# Altium PCB CPU-board-multi-ver3.PcbDoc (part 2 of 3)
Units mil, origin at the board's own origin, x right, y up, seen from the top; angles counter-clockwise.
Board outline 3937 x 2607 mil, 6 copper layers (L1, Power, L2, L3, CommonGND, L4), stack 84 mil thick; 298 components, 216 nets, 1009 pads, 421 vias.
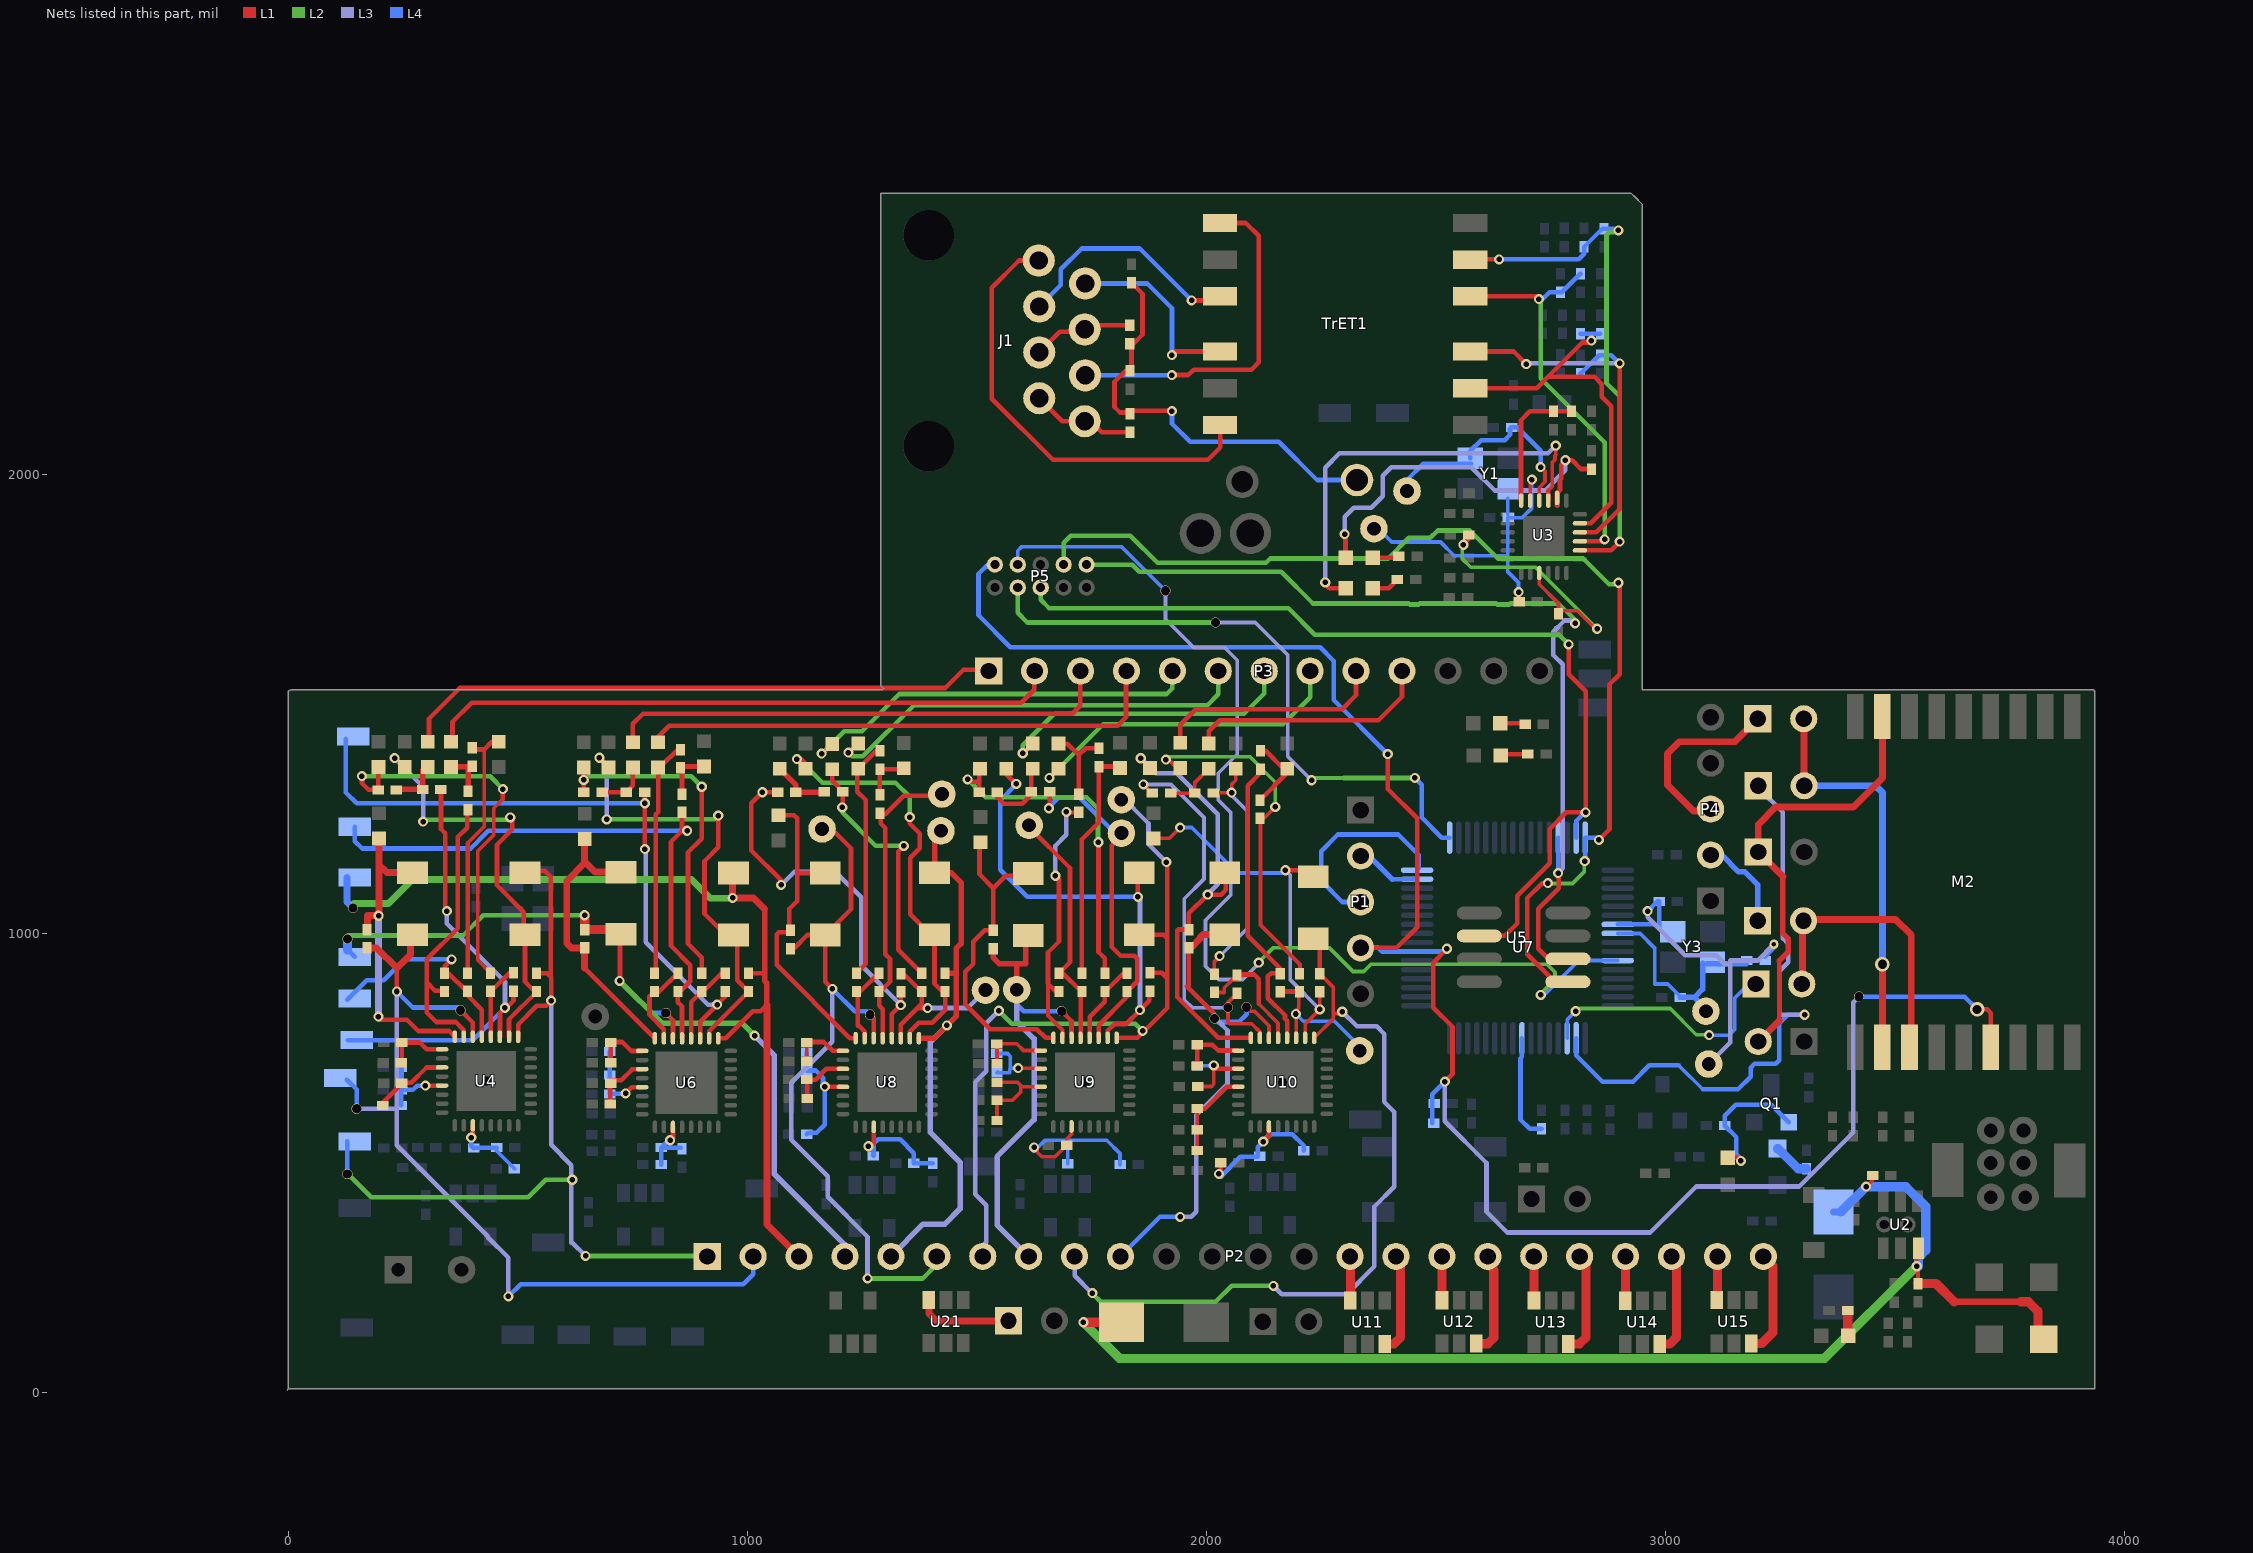
[diagram p6: the nets of this part, all layers, seen from the top]

## Via types
v1: diameter 22, hole 12, L1 to L4, 370 vias
v2: diameter 22, hole 20, L1 to L4, 19 vias
v3: diameter 32, hole 20, L1 to L4, tented top, 19 vias
v4: diameter 20, hole 10, L1 to L4, 4 vias
v5: diameter 22, hole 12, L1 to L4, tented top, 4 vias
v6: diameter 32, hole 20, L1 to L4, 4 vias
v7: diameter 32, hole 18, L1 to L4, tented top, 1 vias

## Nets (pads, with @x,y where several pads share a name; then routed paths per layer and width w, separated by ;. In a path a pad name is that pad's centre, name@x,y a point inside that pad or via, vN(x,y) a via of type N, cw(c..) or ccw(c..) an arc to the next point about the centre after c; other vN are vias at no path point) (continued)
NetC16_2: C16.2 C17.1 U3.6 | length 293.7
  L1 w10: U3.6@2685.76,1942.53 2685.33,1942.96 2685.33,2117.99 2704.79,2137.45 C16.2@2755.97,2137.45 C17.1@2795.34,2137.45
NetC18_1: C18.1 R23.1 TrET1.4 U3.21 | length 899.3
  L1 w10: TrET1.4@2574.87,2387.37 2718.36,2387.37 2724.47,2381.27 v1(2724.47,2381.54) ; U3.21@2813.71,1853.95 2863.54,1853.95 2863.54,1854.11 v1(2867.49,1858.06)
  L2 w10: v1(2724.47,2381.54) 2728.13,2377.88 2728.13,2208.6 2867.49,2069.24 v1(2867.49,1858.06)
  L4 w10: v1@2728.26,2377.74 v1@2728.4,2377.61 ; v1@2728.41,2377.61 2747.46,2396.66 C18.1@2771.72,2396.66 ; C18.1@2774.42,2396.66 2814.42,2436.66 R23.1@2815.02,2436.66
NetC19_1: C19.1 R24.1 TrET1.5 U3.20 | length 1170.1
  L1 w10: TrET1.5@2574.87,2467.37 2575.65,2468.16 v1(2637.86,2468.16) ; U3.20@2813.71,1834.26 2881.86,1834.26 2900.13,1852.53 v1(2900.13,1853.53)
  L2 w10: v1@2897.69,2527.21 2878.02,2527.21 2871.65,2520.84 2871.65,2198.01 2900.13,2169.53 v1(2900.13,1853.53)
  L4 w9: C19.1@2823.5,2495.72 R24.1@2862.87,2535.09
  L4 w10: v1(2637.86,2468.16) 2811.09,2468.16 2822.9,2479.97 C19.1@2822.9,2495.72 C19.1@2823.5,2495.72 ; R24.1@2862.87,2535.09 R24.1@2866.2,2535.09 2889.83,2535.09 2897.7,2527.21 v1(2897.69,2531.14)
NetC20_1: C20.1 R25.1 TrET1.2 U3.23 | length 846.5
  L1 w10: TrET1.2@2574.87,2187.37 2719.28,2187.37 2744.16,2212.25 ; U3.23@2813.71,1893.32 2836.91,1893.32 2881.95,1938.35 2881.95,2148.12 2861.13,2168.94 2861.13,2196.5 2845.38,2212.25 2744.16,2212.25 ; v1@2838.65,2287.06 2818.96,2287.06 2744.16,2212.25
  L4 w10: R25.1@2815.02,2306.11 C20.1@2858.33,2306.11 ; 2837.31,2306.11 2838.65,2304.77 ; v1@2838.65,2287.06 2838.65,2306.11
  other v1: 2838.58,2291.34
NetC21_1: C21.1 R26.1 TrET1.3 U3.22 | length 869.2
  L1 w10: TrET1.3@2574.87,2267.37 2669.35,2267.37 v1(2696.91,2239.81) ; U3.22@2813.71,1873.63 2849.4,1873.63 2900.13,1924.35 v1(2900.13,2241.53)
  L3 w10: v1@2698.13,2241.53 v1(2900.13,2241.53)
  L4 w10: C21.1@2815.02,2219.5 2815.63,2219.5 2855.63,2259.5 R26.1@2858.33,2259.5 2882.16,2259.5 v1(2900.13,2241.53)
NetC22_1: C22.1 R27.2 R28.1 R33.1 R34.2 | length 937.1
  L1 w10: R33.1@1837.13,2417.53 1861.13,2393.53 1861.13,2304.53 1841.13,2284.53 R27.2@1833.13,2284.53 1837.13,2280.53 1837.13,2225.53 1824.36,2225.53 1800.13,2201.29 1800.13,2146.53 1812.13,2134.53 1831.13,2134.53 R34.2@1834.13,2131.53 1841.13,2138.53 v1@1925.26,2138.53
  L4 w10: v1(1925.26,2137.45) 1925.26,2109.89 1964.63,2070.52 2158.13,2070.52 2241.19,1987.46 C22.1@2328.13,1987.46
NetC24_1: C24.1 R36.1 U3.15 | length 624.7
  L1 w8: v1(2560.13,1846.53) 2571.13,1857.53 R36.1@2571.13,1867.53 ; U3.15@2725.13,1785.05 2725.13,1760.53 2767.13,1718.53 C24.1@2767.13,1696.53 C24.1@2771.13,1692.53 ; C24.1@2775.93,1702.73 2808.17,1702.73 2847.13,1663.77 2847.13,1659.53 v1(2851.13,1663.53)
  L2 w8: v1(2560.13,1846.53) 2557.13,1846.53 2557.13,1816.61 2576.2,1797.53 2716.88,1797.53 2850.88,1663.53 v1(2851.13,1663.53)
NetC25_1: C25.1 TP3.1 U3.4 Y1.1 | length 516.6
  L1 w8: U3.4@2725.13,1942.53 2725.13,1970.87 2737.73,1983.47 2737.73,2005.93 v1(2728.13,2015.53) ; v1@2728.41,2017.69 v1@2729.35,2016.75
  L4 w10: TP3.1@2437.13,1963.53 2437.13,1987.53 2472.13,2022.53 Y1.1@2577.13,2022.53 ; Y1.1@2574.87,2035.09 2574.87,2050.83 2598.49,2074.46 2649.67,2074.46 2661.48,2086.27 2661.48,2099.37 2664.13,2102.02 C25.1@2665.42,2102.02 2677.23,2102.02 2728.13,2051.12 v1(2728.13,2015.53)
NetC26_1: C26.1 R35.2 TP2.1 U3.5 Y1.3 | length 710.2
  L1 w8: v1(2680.13,1743.53) 2681.13,1742.53 R35.2@2681.13,1722.53 ; U3.5@2705.44,1942.53 v1@2705.44,1984.84
  L4 w8: TP2.1@2365.13,1881.53 2375.13,1881.53 2404.13,1852.53 2510.13,1852.53 2540.13,1822.53 2656.23,1822.53 ; C26.1@2656.23,1912.43 Y1.3@2656.23,1948.09 ; v1(2680.13,1743.53) 2680.13,1764.53 2656.23,1788.43 2656.23,1822.53 ; v1(2709.13,1988.53) 2709.13,1926.53 2687.76,1905.17 2656.23,1905.17 2656.23,1822.53
NetC27_1: C27.1 C33.1 C39.1 U4.27 | length 167.4
  L1 w10: v1(399.13,555.53) 397.21,557.45 397.04,557.45 402.6,563 U4.27@402.6,582.07
  L4 w8: C33.1@454.13,533.53 454.13,526.53 C27.1@493.13,487.53
  L4 w10: v1(399.13,555.53) 399.13,537.53 C39.1@404.13,532.53 405.13,533.53 C33.1@454.13,533.53
NetC28_1: C28.1 C32.1 C36.1 U4.21 | length 177
  L1 w10: v1(299.13,668.53) 299.13,669.53 299.97,668.69 U4.21@335.67,668.69
  L4 w10: C28.1@246.13,625.53 246.13,658.53 C36.1@247.13,659.53 ; C32.1@247.13,708.53 C36.1@247.13,659.53 ; v1(299.13,668.53) 281.13,668.53 272.13,659.53 C36.1@247.13,659.53
NetC35_1: C35.1 R42.1 U4.12 | length 166
  L1 w10: U4.12@441.97,774.98 441.97,872.83 R42.1@441.13,873.67 442.17,873.67 483.03,914.53 C35.1@491.13,914.53
NetC35_2: C35.2 pad.1@149.61,767.72 R40.1 U4.11 | length 1020.4
  L1 w10: R40.1@333.13,1313.53 333.13,1227.53 342.13,1218.53 342.13,1048.53 v1(346.13,1048.53) ; U4.11@461.65,774.98 461.65,827.39 v1(472.5,838.24) ; v1@474.17,836.57 491.13,853.53 C35.2@491.13,874.53
  L2 w10: v1@472.5,837.56 v1(472.5,838.24)
  L3 w10: v1(346.13,1048.53) 346.13,1021.53 472.5,895.15 v1(472.5,838.24)
  L4 w10: pad.1@130.13,767.53 130.31,767.72 401.98,767.72 v1(472.5,838.24)
NetC42_1: C42.1 R46.2 TP11.1 U5.40 Y3.1 | length 479.8
  L4 w8: U5.40@2896.13,1000.01 2944.88,1000 2976.39,968.49 2976.39,889.76 3004.91,889.76 C42.1@3032.13,862.54
  L4 w10: 3157.58,933.07 R46.2@3176.54,933.07
  L4 w12: C42.1@3032.13,862.54 C42.1@3032.13,860.53 3063.13,860.53 ; Y3.1@3081.13,934.6 3081.13,878.53 3063.13,860.53 ; TP11.1@3088.13,830.53 3088.13,835.53 3063.13,860.53 ; Y3.1@3091.13,933.53 3158.04,933.53
NetC43_1: C43.1 L6.2 R45.2 U4.10 | length 959
  L1 w10: v1(232.28,1381.89) L6.2@254.13,1362.53 ; U4.10@481.34,774.98 481.34,812.74 541.13,872.53 C43.1@541.13,873.53 537.13,873.53 516.13,894.53 R45.2@516.13,997.53 R45.2@513.13,1000.53 ; v1(484.13,1252.53) 488.13,1248.53 488.13,1226.53 455.13,1193.53 455.13,1104.53 513.13,1046.53 R45.2@513.13,985.53
  L2 w10: v1@294.13,1247.53 479.13,1247.53 v1(484.13,1252.53)
  L3 w10: v1@230.93,1384.14 230.87,1384.14 230.54,1383.81 230.54,1383.11 294.13,1319.53 v1(294.13,1243.53)
NetC43_2: C43.2 P2.1 pad.1@145.67,547.24 R45.1 U4.9 | length 1947.1
  L1 w10: U4.9@501.02,774.98 501.02,801.43 542.13,842.53 562.13,842.53 v1(573.13,853.53) 573.13,904.53 ; R45.1@516.13,1132.53 520.13,1136.53 559.13,1136.53 572.13,1123.53 572.13,905.53 564.13,913.53 C43.2@541.13,913.53
  L2 w10: v2(129.13,476.38) v2@129.13,477.53 ; v2@129.7,476.95 181.13,425.53 523.13,425.53 561.13,463.53 v1(619.13,463.53) ; v1(648.13,297.53) 912.13,297.53 P2.1@913.13,296.53
  L3 w10: v2(129.13,476.38) v2@129.13,483.46 ; v1(573.13,853.53) 573.13,539.53 617.13,495.53 617.13,326.53 619.13,326.53 v1(648.13,297.53)
  L4 w10: v2(129.13,476.38) pad.1@129.13,547.24 ; P2.1@912.13,297.53 P2.1@913.13,296.53
NetC46_1: C46.1 U5.56 | length 232.6
  L4 w10: U5.56@2687.46,771.66 2687.46,731.52 2684.33,728.39 2684.33,594.33 2704.13,574.53 C46.1@2730.13,574.53
NetC47_1: C47.1 R46.1 TP12.1 U5.39 Y3.3 | length 813.4
  L3 w10: v1(2961.13,1048.53) 2961.13,1035.07 3043.44,952.76 3110.24,952.76 3129.92,933.07 3141.13,933.07 ; TP12.1@3094.13,715.53 3141.13,762.53 3141.13,940.94 3200.79,940.94 v4(3236.22,976.38)
  L4 w10: U5.39@2896.13,1019.69 2976.35,1019.69 2986.13,1009.91 C47.1@2986.13,1069.53 2982.13,1069.53 v1(2961.13,1048.53) ; R46.1@3216.54,948.82 3236.22,968.5 v4(3236.22,976.38)
NetC48_1: C48.1 pad.1@145.67,858.27 R50.1 U4.13 | length 477.8
  L1 w10: v1(356.13,943.53) 341.13,928.53 C48.1@341.13,913.53 349.23,913.53 389.08,873.67 R50.1@391.13,873.67 391.13,864.78 422.28,833.62 U4.13@422.28,774.98
  L4 w10: pad.1@129.13,855.53 171.24,897.64 208.66,897.64 254.55,943.53 v1(356.13,943.53)
NetC48_2: C48.2 R47.1 U4.15 | length 637.3
  L1 w10: C48.2@341.13,873.53 339.13,875.53 320.13,875.53 302.13,893.53 ; U4.15@382.91,774.98 382.91,789.22 365.04,807.09 322.83,807.09 302.13,827.8 302.13,893.53 ; R47.1@392.13,1269.53 390.13,1267.53 390.13,1230.53 370.13,1210.53 370.13,1011.53 302.13,943.53 302.13,893.53
NetC50_1: C50.1 C52.2 U4.19 | length 165.8
  L1 w10: C52.2@206.13,628.53 206.13,630.93 248.13,672.93 C50.1@248.13,673.53 ; C50.1@246.13,674.53 268.13,674.53 301.65,708.06 U4.19@335.67,708.06
NetC51_1: C51.1 C53.1 U4.17 | length 136.8
  L1 w10: C51.1@248.13,718.53 248.13,746.53 ; 248.13,747.53 C53.1@248.13,762.53 287.13,762.53 302.23,747.43 U4.17@335.67,747.43
NetC54_1: C54.1 L9.2 R53.2 U4.16 | length 705.4
  L1 w10: v1@196.13,811.75 259.12,811.75 283.34,787.53 350.68,787.53 U4.16@363.23,774.98
  L1 w15: C54.1@172.13,1008.53 173.13,1009.53 173.13,1039.02 198.13,1039.02 198.13,1149.53 ; L9.2@198.13,1206.53 198.13,1149.53 ; R53.2@271.13,1132.53 215.13,1132.53 198.13,1149.53
  L3 w15: v1@197.13,818.9 v1(197.13,1038.53)
  other v1: 196.85,818.9
NetC54_2: C54.2 P2.2 pad.1@114.17,685.04 R53.1 U4.14 | length 1962
  L1 w10: v1(237.13,873.53) 237.13,924.53 ; v2(375.98,832.68) 402.6,806.06 U4.14@402.6,774.98
  L1 w15: C54.2@172.13,968.53 193.13,968.53 237.13,924.53 267.13,954.53 267.13,993.53 R53.1@271.13,997.53
  L3 w10: v2(149.61,618.11) 237.13,618.11 ; v1(237.13,873.53) 237.13,618.11 ; v1(480.13,209.53) 480.13,293.53 435.07,338.58 435.07,340.52 237.13,538.46 237.13,618.11
  L4 w10: pad.1@128.13,681.53 149.61,660.05 v2(149.61,618.11) ; v1(237.13,873.53) 271.86,838.79 ; 271.93,838.58 370.08,838.58 v2(375.98,832.68) ; v1(480.13,209.53) 506.82,236.22 991.82,236.22 1013.13,257.53 P2.2@1013.13,296.53
NetC59_1: C59.1 C62.1 C63.1 U6.21 | length 169.1
  L1 w10: v1(735.13,651.53) 748.83,665.23 U6.21@771.51,665.23
  L2 w10: v1@735.13,650.53 v1(735.13,651.53)
  L4 w10: C62.1@701.13,742.53 C59.1@701.13,691.53 C63.1@701.13,650.53 v1@735.13,650.53
NetC60_1: C60.1 C61.1 C64.1 U6.27 | length 150
  L1 w10: v1(832.13,549.53) 834.13,549.53 838.44,553.84 U6.27@838.44,578.61
  L4 w10: C60.1@813.13,496.53 C64.1@813.13,533.53 ; v1(832.13,549.53) 834.13,549.53 837.13,552.53 832.13,552.53 C64.1@813.13,533.53 ; C61.1@855.13,533.53 C64.1@813.13,533.53
NetC65_1: C65.1 R58.1 U6.12 | length 179.2
  L1 w10: U6.12@877.81,771.53 877.81,850.21 R58.1@901.13,873.53 904.03,873.53 944.03,913.53 C65.1@952.13,913.53
NetC65_2: C65.2 pad.T14 R55.1 U6.11 | length 1439.2
  L1 w10: v1(777.13,1183.53) v1(777.13,1283.53) R55.1@777.13,1307.53 ; U6.11@897.5,771.53 897.5,807.9 v1(934.49,844.89) ; v1@938.57,848.97 952.13,862.53 C65.2@952.13,873.53
  L2 w10: v1@775.33,1285.33 v1(777.13,1283.53)
  L3 w10: v1(777.13,1183.53) 779.13,1183.53 779.13,980.53 914.76,844.89 v1(934.49,844.89)
  L4 w10: pad.T14@126.13,1423.53 126.13,1306.94 149.54,1283.53 v1(777.13,1283.53)
NetC66_1: C66.1 L12.2 R61.2 U6.10 | length 1003.6
  L1 w10: v1(678.13,1382.53) 677.13,1383.53 676.13,1383.53 L12.2@698.13,1361.53 ; U6.10@917.18,771.53 917.18,787.58 C66.1@1003.13,873.53 1002.52,873.53 978.13,897.93 978.13,988.53 R61.2@970.13,996.53 953.13,996.53 907.13,1042.53 907.13,1157.53 937.13,1187.53 v1(937.13,1256.53)
  L2 w10: v1(694.13,1248.53) 929.13,1248.53 v1(937.13,1256.53)
  L3 w10: v1(678.13,1382.53) 694.13,1366.53 v1(694.13,1248.53)
NetC66_2: C66.2 P2.3 pad.1@145.67,1122.05 R61.1 U6.9 | length 2022.7
  L1 w10: U6.9@936.87,771.53 953.13,771.53 1012.13,830.53 1029.13,830.53 1043.13,844.53 ; C66.2@1003.13,913.53 1030.13,913.53
  L1 w12: 1038.13,1053.53 1038.13,896.53 1043.13,891.53 1043.13,844.53
  L1 w15: R61.1@970.13,1131.53 968.13,1129.53 v1(968.13,1077.53) 1014.13,1077.53 1038.13,1053.53 ; 1043.13,844.53 1043.13,366.53 P2.3@1113.13,296.53
  L2 w15: v2@143.57,1064.83 218.95,1064.83 271.65,1117.53 879.13,1117.53 920.13,1076.53 967.13,1076.53 v1(968.13,1077.53)
  L4 w15: pad.1@128.13,1122.05 128.13,1068.72 v2(141.73,1055.12)
NetC67_1: C67.1 M2.15 P1.4 P5.2 R59.1 U5.7 | length 4276
  L1 w10: P1.4@2336.13,968.53 2414.13,968.53 2459.13,1013.53 2459.13,1250.53 2395.13,1314.53 v1(2395.13,1390.53) ; v1(2519.69,677.17) 2535.43,692.91 2536.13,692.91 2536.13,796.53 2494.13,838.53 2494.13,936.53 v1(2524.13,966.53) ; v6(3678.84,834.65) 3700.79,834.65 3708.66,826.77 M2.15@3708.66,751.97
  L3 w10: v1(2519.69,677.17) 2519.69,590.55 2610.24,500 2610.24,393.7 2655.21,348.73 2966.84,348.73 3066.93,448.82 3291.34,448.82 3409.45,566.93 3409.45,850.39 v2(3421.26,862.2)
  L4 w10: P5.2@1539.37,1803.15 1523.62,1803.15 1503.94,1783.46 1503.94,1692.91 1573.32,1623.53 2247.78,1623.53 2277.13,1594.18 2277.13,1508.53 v1(2395.13,1390.53) ; P1.4@2336.13,968.53 2374.35,968.53 2382.24,960.64 U5.7@2459.12,960.64 2521.24,960.64 2524.13,963.53 v1(2524.13,966.53) ; C67.1@2492.13,586.61 2492.13,649.61 v1(2519.69,677.17) ; v2(3421.26,862.2) 3651.28,862.2 v6(3678.84,834.65)
NetC68_1: C68.1 pad.1@145.67,1232.28 R66.1 U6.13 | length 1319.6
  L1 w10: U6.13@858.13,771.53 858.13,841.53 849.13,850.53 C68.1@849.13,873.53 854.13,873.53 876.13,895.53 876.13,930.93 834.13,972.93 834.13,1199.53 858.13,1223.53 v1(869.13,1223.53) ; 858.13,1229.53 R66.1@858.13,1263.53
  L4 w10: pad.1@145.67,1232.28 145.67,1200.79 161.42,1185.04 397.64,1185.04 436.13,1223.53 v1(869.13,1223.53)
NetC68_2: C68.2 R63.1 U6.15 | length 187
  L1 w10: U6.15@818.76,771.53 818.76,791.48 787.4,822.83 787.4,862.8 R63.1@798.13,873.53 808.52,873.53 848.52,913.53 C68.2@849.13,913.53
NetC69_1: C69.1 C71.1 U6.19 | length 124.4
  L1 w10: C71.1@702.13,628.53 702.13,672.53 C69.1@703.13,673.53 ; C69.1@703.13,680.53 726.13,680.53 749.13,703.53 749.13,704.6 U6.19@771.51,704.6
NetC70_1: C70.1 C72.1 U6.17 | length 114.5
  L1 w10: C72.1@703.13,718.53 C70.1@703.13,762.53 ; C70.1@709.13,763.53 728.13,763.53 747.68,743.97 U6.17@771.51,743.97
NetC73_1: C73.1 L15.2 R72.2 U6.16 | length 635.2
  L1 w10: 646.13,924.47 U6.16@799.07,771.53
  L1 w15: 646.13,924.47 C73.1@646.13,968.53 617.13,968.53 607.13,978.53 607.13,1114.53 646.13,1153.53 646.13,1156.53 ; L15.2@646.13,1205.53 646.13,1156.53 ; R72.2@725.13,1133.53 669.13,1133.53 646.13,1156.53
NetC73_2: C73.2 P2.4 pad.1@145.67,948.82 R72.1 U6.14 | length 1901.4
  L1 w10: v1@723.13,896.53 723.13,996.53 R72.1@725.13,998.53 ; v2(822.83,826.77) 838.58,811.02 U6.14@838.58,771.67
  L1 w20: v1(646.13,1039.53) C73.2@646.13,1008.53 715.13,1008.53 R72.1@725.13,998.53
  L2 w10: v2(129.92,988.19) 130.46,988.72 130.46,995.53 381.13,995.53 425.13,1039.53 v1(646.13,1039.53)
  L2 w12: v1(722.13,896.53) 814.13,804.53 989.13,804.53 v1(1016.13,777.53)
  L3 w12: v1(1016.13,777.53) 1059.13,734.53 1059.13,475.53 1213.13,321.53 P2.4@1213.13,296.53
  L4 w10: pad.1@129.92,964.57 pad.1@145.67,948.82 ; v1(722.13,896.53) 791.88,826.77 v2(822.83,826.77)
  L4 w20: pad.1@129.92,964.57 v2(129.92,988.19)
NetC77_1: C77.1 C79.1 C81.1 U8.27 | length 245.2
  L1 w10: v1(1264.13,536.53) 1270.13,536.53 1275.6,542 U8.27@1275.6,579.07
  L4 w10: C79.1@1275.13,515.53 1275.13,539.53 1274.13,540.53 1285.13,551.53 1333.13,551.53 1363.13,521.53 C81.1@1363.13,499.53 C77.1@1404.13,499.53
NetC78_1: C78.1 C80.1 C82.1 U8.21 | length 272.9
  L1 w10: v1(1169.13,666.53) 1169.97,665.69 U8.21@1208.67,665.69
  L4 w10: C78.1@1130.13,562.53 1133.13,565.53 1151.13,565.53 1169.13,583.53 v1(1169.13,666.53) 1165.13,670.53 1165.13,685.53 1149.13,701.53 C80.1@1130.13,701.53 C82.1@1130.13,741.53
NetC83_1: C83.1 R77.1 U8.12 | length 860.4
  L1 w10: R77.1@1066.13,1307.53 v1(1033.13,1307.53) 1009.13,1283.53 1009.13,1180.53 1074.13,1115.53 v1(1074.13,1105.53) ; U8.12@1314.97,771.98 1314.97,824.53 1315.13,824.53 v1(1334.63,844.03) 1334.63,872.03 C83.1@1335.13,872.53
  L3 w10: v1(1074.13,1105.53) 1103.13,1134.53 1192.13,1134.53 1248.13,1078.53 1248.13,930.53 v1(1334.63,844.03)
NetC83_2: C83.2 R74.1 TP18.1 U8.11 | length 363.8
  L1 w10: U8.11@1334.65,771.98 1334.65,801.06 1370.63,837.03 ; C83.2@1335.13,912.53 1340.52,912.53 1379.52,873.53 R74.1@1380.13,873.53 1380.13,846.53 1370.63,837.03 ; v1(1393.13,837.53) 1392.63,837.03 1370.63,837.03
  L3 w10: v1(1393.13,837.53) 1480.13,837.53 1520.13,877.53 TP18.1@1536.13,877.53
NetC84_1: C84.1 L18.2 R78.2 U8.10 | length 951
  L1 w10: v1(1108.28,1379.53) 1118.13,1379.53 1127.13,1370.53 L18.2@1127.13,1358.53 ; v1(1354.13,1253.53) 1354.13,1239.53 1376.13,1217.53 1376.13,1185.53 1355.13,1164.53 1355.13,1041.53 1399.13,997.53 R78.2@1408.13,997.53 1408.13,890.13 1424.73,873.53 C84.1@1431.13,873.53 1431.13,833.53 1403.13,805.53 1373.65,805.53 1354.34,786.22 U8.10@1354.34,771.98
  L2 w10: v1@1107.17,1385.48 1164.13,1328.53 1323.13,1328.53 1354.13,1297.53 v1(1354.13,1253.53) ; v1(1108.28,1379.53) 1108.28,1379.62 v1(1108.28,1379.53)
NetC84_2: C84.2 P2.5 R78.1 TP19.1 U8.9 | length 1219.2
  L1 w12: U8.9@1374.02,771.98 1407.58,771.98 v1(1435.13,799.53) 1455.13,819.53 1455.13,913.53 ; TP19.1@1422.13,1223.53 1408.13,1209.53 R78.1@1408.13,1132.53 1444.13,1132.53 1466.13,1110.53 1466.13,977.94 1455.13,966.94 1455.13,913.53 ; C84.2@1431.13,913.53 1455.13,913.53
  L3 w12: P2.5@1313.13,296.53 1383.4,366.8 1430.4,366.8 1464.13,400.53 1464.13,425.78 1464.13,476.28 1464.13,501.53 1399.13,566.53 1399.13,763.53 v1(1435.13,799.53)
NetC85_1: C85.1 R83.1 TP20.1 U8.13 | length 643
  L1 w10: C85.1@1287.13,873.53 1290.13,873.53 1311.13,894.53 1311.13,944.53 1301.13,954.53 1301.13,1229.53 1291.13,1239.53 1291.13,1259.53 1301.13,1259.53 1341.13,1299.53 TP20.1@1407.13,1299.53 ; C85.1@1287.44,873.21 1287.44,842.53 1295.28,834.69 U8.13@1295.28,771.98
NetC85_2: C85.2 R80.1 U8.15 | length 179.4
  L1 w10: R80.1@1243.13,868.53 R80.1@1240.81,870.85 ; U8.15@1255.91,771.98 1255.91,786.22 1243.57,798.56 1240.81,798.56 R80.1@1240.81,870.85 ; C85.2@1287.13,913.53 1286.23,913.53 1246.23,873.53 R80.1@1238.13,873.53 R80.1@1240.81,870.85
NetC86_1: C86.1 C88.1 U8.19 | length 129.7
  L1 w10: C86.1@1131.13,640.53 1131.13,680.53 C88.1@1130.13,681.53 1149.13,681.53 1172.65,705.06 U8.19@1208.67,705.06
NetC87_1: C87.1 C89.1 U8.17 | length 128.7
  L1 w8: C87.1@1130.13,721.53 1130.13,760.53 C89.1@1130.13,762.53
  L1 w10: C89.1@1130.13,760.53 1133.13,763.53 1167.13,763.53 1186.23,744.43 U8.17@1208.67,744.43
NetC90_1: C90.1 L21.2 R85.2 U8.16 | length 693.4
  L1 w10: L21.2@1068.13,1257.53 1102.13,1257.53 1109.13,1250.53 1109.13,1132.53 ; C90.1@1092.13,1007.53 1092.13,1053.53 1109.13,1070.53 1109.13,1132.53 ; C90.1@1094.13,1006.53 1090.13,1002.53 1068.93,1002.53 1064.13,997.73 1064.13,931.53 1223.67,771.98 U8.16@1236.23,771.98 ; R85.2@1170.13,1131.53 1110.13,1131.53 1109.13,1132.53
NetC90_2: C90.2 P2.6 R85.1 TP21.1@1163.13,1227.53 U8.14 | length 1581.5
  L1 w10: C90.2@1094.13,966.53 1101.13,966.53 1131.13,996.53 R85.1@1170.13,996.53 ; TP21.1@1163.13,1227.53 1184.13,1227.53 1226.13,1185.53 1226.13,1052.53 R85.1@1170.13,996.53 ; v1(1185.63,879.03) 1170.13,894.53 R85.1@1170.13,996.53 ; v2(1267.71,822.83) 1275.6,814.95 U8.14@1275.6,771.98
  L2 w10: v1(1262.13,248.53) 1382.13,248.53 1413.13,279.53 P2.6@1413.13,296.53
  L3 w10: 1185.38,763.78 1096.13,674.53 1096.13,550.73 1175.33,471.53 1175.33,426.33 1262.13,339.53 v1(1262.13,248.53) ; 1185.63,763.78 v1(1185.63,879.03)
  L4 w10: v1(1185.63,879.03) 1233.94,830.71 1259.84,830.71 v2(1267.71,822.83)
NetC91_1: C91.1 C96.1 C99.1 U9.27 | length 477.8
  L1 w8: v1(1624.83,533.97) 1631.83,526.97 1631.83,523.64 1641.94,513.53 1670.31,513.53 1695.31,538.53 C91.1@1696.13,538.53 1696.13,552.53 1706.44,562.84 U9.27@1706.44,579.62
  L4 w8: v1(1624.83,533.97) 1624.83,525.83 1648.53,549.53 1749.13,549.53 ; C96.1@1698.13,498.53 1698.13,544.58 1703.07,549.53 1749.13,549.53 ; C99.1@1812.13,496.53 1812.13,520.53 1783.13,549.53 1749.13,549.53
NetC93_1: C93.1 C98.2 C100.1 U9.21 | length 205.7
  L1 w8: 1544.13,603.53 C93.1@1544.13,636.53 1578.13,636.53 1596.13,654.53 1596.13,668.53 ; C100.1@1544.13,675.53 1589.13,675.53 1598.42,666.23 U9.21@1639.51,666.23
NetC94_1: C94.1 R89.1 U9.12 | length 179.4
  L1 w10: U9.12@1745.81,772.53 1745.81,818.21 1779.13,851.53 R89.1@1779.13,873.53 1779.73,873.53 1819.73,913.53 C94.1@1827.13,913.53
NetC94_2: C94.2 R87.1 TP21.1@1815.13,1218.53 U9.11 | length 772.3
  L1 w10: v1(1657.13,1272.53) 1657.13,1274.53 1659.13,1272.53 R87.1@1659.13,1308.53 ; U9.11@1765.5,772.53 1765.5,799.9 1827.13,861.53 C94.2@1827.13,873.53 1827.73,873.53 1849.93,895.73 1849.93,944.73 1843.13,951.53 1813.13,951.53 1794.13,970.53 1794.13,1191.53 1801.13,1198.53 1801.13,1204.53 TP21.1@1815.13,1218.53
  L4 w10: v1(1657.13,1272.53) 1657.13,1275.24 1677.17,1295.28 1724.41,1295.28 1801.16,1218.53 TP21.1@1815.13,1218.53
NetC101_1: C101.1 L24.2 R90.2 U9.10 | length 1026.7
  L1 w10: L24.2@1564.13,1357.53 1564.13,1346.53 1586.13,1324.53 v1(1586.13,1325.53) ; U9.10@1785.18,772.53 1785.18,788.58 1799.13,802.53 1824.95,802.53 v1(1855.54,833.11) 1876.13,853.7 1876.13,873.53 C101.1@1877.13,874.53 ; v1(1851.13,1079.53) 1851.13,1129.53 R90.2@1854.13,1132.53
  L3 w10: v1@1586.13,1324.53 v1(1586.13,1325.53) ; v1(1851.13,1079.53) 1855.54,1075.11 v1(1855.54,833.11)
  L4 w10: v1@1586.13,1324.53 1551.13,1289.53 1551.13,1138.53 1610.13,1079.53 v1(1851.13,1079.53)
NetC101_2: C101.2 P2.7 R90.1 TP22.1 U9.9 | length 1650.4
  L1 w10: U9.9@1804.87,772.53 1850.13,772.53 1915.13,837.53 1915.13,902.53 ; R90.1@1854.13,997.53 1907.13,997.53 1915.13,989.53 ; C101.2@1877.13,914.53 1903.13,914.53 1915.13,902.53 ; v1(1913.13,1155.53) 1913.53,1155.93 1914.73,1155.93 1915.13,1155.53 1915.13,989.53 ; 1915.13,902.53 1915.13,989.53
  L2 w10: v1(1548.13,831.53) 1576.5,803.15 1845.5,803.15 v1(1861.13,787.53)
  L3 w10: P2.7@1513.13,296.53 1513.13,319.53 1521.13,327.53 1521.13,408.01 1497.13,432.01 1497.13,675.53 1521.13,699.53 1521.13,804.53 v1(1548.13,831.53) ; TP22.1@1814.13,1299.53 1874.13,1239.53 1874.13,1194.53 v1(1913.13,1155.53)
NetC102_1: C102.1 R95.1 TP23.1 U9.13 | length 533.6
  L1 w10: TP23.1@1614.13,1231.53 1703.13,1142.53 1703.13,937.53 C102.1@1679.13,913.53 1687.23,913.53 1727.23,873.53 R95.1@1729.13,873.53 1726.13,870.53 U9.13@1726.13,772.53
NetC102_2: C102.2 R92.1 U9.15 | length 586.8
  L1 w8: 1655.13,890.53 1655.13,821.25 1686.76,789.62 U9.15@1686.76,772.53 ; v1(1695.13,1264.53) 1696.13,1263.53 R92.1@1722.13,1263.53
  L1 w10: v1(1671.13,1125.53) 1679.13,1117.53 1679.13,982.53 1655.13,958.53 1655.13,890.53 1672.13,873.53 C102.2@1679.13,873.53
  L3 w10: v1(1671.13,1125.53) 1671.13,1190.53 1695.13,1214.53 v1(1695.13,1264.53)
NetC103_1: C103.1 L27.2 R96.2 U9.16 | length 713.9
  L1 w10: L27.2@1508.13,1198.53 1506.13,1196.53 1506.13,1128.53 1536.13,1098.53 ; R96.2@1612.13,1130.53 1607.13,1125.53 1563.13,1125.53 1536.13,1098.53 ; U9.16@1667.07,772.53 1650.13,772.53 1631.13,791.53 1529.53,791.53 1475.13,845.93 1475.13,916.53 1492.13,933.53 1492.13,981.53 1517.13,1006.53 C103.1@1536.13,1006.53 1536.13,1098.53
NetC103_2: C103.2 P2.8 R96.1 TP24.1 U9.14 | length 1100.7
  L1 w10: v2(1685.04,830.71) 1706.44,809.31 U9.14@1706.44,772.53
  L1 w12: C103.2@1536.13,966.53 1536.13,946.53 1549.13,933.53 1587.13,933.53 ; TP24.1@1587.13,860.53 TP24.1@1587.13,877.53 1587.13,933.53 ; TP24.1@1607.13,883.53 TP24.1@1611.13,879.53 ; R96.1@1612.13,995.53 1607.13,990.53 1607.13,933.53 1587.13,933.53
  L3 w12: TP24.1@1587.13,877.53 1587.13,808.53 1625.13,770.53 1625.13,594.53 1544.33,513.73 1544.33,365.33 P2.8@1613.13,296.53
  L4 w10: TP24.1@1587.13,877.53 1587.13,845.94 1602.36,830.71 v2(1685.04,830.71)
NetC104_1: C104.1 C105.1 U9.19 | length 166.9
  L1 w8: v1(1590.13,706.53) 1638.58,706.53 U9.19@1639.51,705.6
  L4 w8: C105.1@1543.13,738.53 1567.13,738.53 1573.13,732.53 1573.13,706.53 v1(1590.13,706.53) ; C104.1@1546.13,698.53 C104.1@1544.13,696.53 1572.13,696.53 1572.13,704.53 1574.13,706.53
NetC106_1: C106.1 C107.1 U9.17 | length 145.8
  L1 w8: C107.1@1544.13,716.53 1544.13,758.53 C106.1@1543.13,759.53 1587.13,759.53 1601.68,744.97 U9.17@1639.51,744.97
NetC111_1: C111.1 C115.1 C116.1 U10.21 | length 200.2
  L1 w8: C115.1@1980.13,527.53 C111.1@1980.13,572.53 C116.1@1980.13,618.53
  L1 w10: C116.1@1980.13,618.53 1997.13,618.53 2044.83,666.23 U10.21@2069.57,666.23
NetC112_1: C112.1 C113.1 C117.1 U10.27 | length 315.5
  L1 w10: v1@2031.13,479.95 C117.1@2031.13,500.53 ; v1(2124.13,546.53) 2134.49,556.89 2136.5,556.89 U10.27@2136.5,579.61
  L4 w10: v1@2027.56,476.1 v1(2027.56,476.38) ; v1@2031.13,470.53 v1@2032.13,471.53 ; v1@2033.13,470.53 v1@2032.13,471.53 ; v1@2123.13,547.53 2138.24,562.65 2187.61,562.65 2212.13,538.13 C112.1@2212.13,526.53 ; v1(2124.13,546.53) 2112.13,534.53 2112.13,513.53 2074.13,513.53 v1@2032.13,471.53
NetC114_1: C114.1 R104.1 U10.12 | length 660.3
  L1 w10: R104.1@2118.13,1357.53 2118.13,1349.53 2090.13,1321.53 2090.13,994.53 2161.13,923.53 2151.13,913.53 2141.13,913.53 2134.13,906.53 2134.13,858.93 2171.33,821.73 2171.33,814.67 2175.87,810.13 U10.12@2175.87,772.53
NetC114_2: C114.2 R101.1 TP25.1 U10.11 | length 307.1
  L1 w8: U10.11@2195.55,772.53 v1@2195.55,824.53 ; v1@2195.55,832.1 2201.13,837.68 R101.1@2201.13,870.53
  L1 w10: C114.2@2161.13,873.53 R101.1@2198.13,873.53
  L4 w8: v1(2195.13,824.53) 2211.13,808.53 2279.13,808.53 2334.13,753.53 TP25.1@2334.13,744.53
NetC118_1: C118.1 L30.2 R106.2 U10.10 | length 855.5
  L1 w8: L30.2@1885.13,1206.53 1885.93,1207.33 1919.93,1207.33 v1(1943.13,1230.53) ; U10.10@2215.24,772.53 2215.24,802.64 v1(2247.13,834.53) C118.1@2247.13,872.53
  L1 w10: v1(2172.13,1137.53) 2219.13,1137.53 R106.2@2233.13,1123.53 ; R106.2@2233.13,1112.53 R106.2@2234.13,1112.53
  L3 w8: v1(2172.13,1137.53) 2183.13,1126.53 2183.13,898.53 v1(2247.13,834.53)
  L4 w8: v1(1943.13,1230.53) 1968.13,1230.53 2067.13,1131.53 2166.13,1131.53 v1(2172.13,1137.53)
NetC118_2: C118.2 P2.9 R106.1 U10.9 | length 1654.7
  L1 w8: U10.9@2234.92,772.53 2235.13,772.53 2276.13,813.53 2276.13,825.53 ; C118.2@2247.13,912.53 2276.13,883.53 2276.13,825.53 ; v1(2296.13,829.53) 2292.13,825.53 2276.13,825.53
  L1 w10: C118.2@2247.13,912.53 R106.1@2247.13,964.53
  L2 w10: v1(1751.97,216.54) 1751.97,215.69 1770.13,197.53 2020.13,197.53 2055.13,232.53 v1(2146.13,232.53)
  L3 w10: P2.9@1713.13,296.53 1713.13,254.53 1751.97,215.69 v1(1751.97,216.54) ; v1(2146.13,232.53) 2164.13,214.53 2305.49,214.53 2366.2,275.24 2366.2,405.17 2409.51,448.47 2409.51,611.13 2387.13,633.51 2387.13,781.53 2371.13,797.53 2328.13,797.53 v1(2296.13,829.53)
NetC119_1: C119.1 R111.1 U10.13 | length 268.2
  L1 w8: R111.1@2017.61,871.53 2039.13,871.53 2039.13,881.65 2058.26,900.78 2068.38,900.78 2078.13,910.53 ; 2114.17,846.65 2156.18,804.64 U10.13@2156.18,772.53
  L1 w10: 2078.13,910.53 2104.13,910.53 2114.17,900.48 2114.17,846.65
NetC119_2: C119.2 R109.1 U10.15 | length 868.2
  L1 w8: v1(1863.13,1324.53) R109.1@1882.13,1305.53 ; C119.2@2066.93,869.45 2047.24,849.76 v2(2047.24,838.58) 2047.24,807.09 2051.18,803.15 2099.01,803.15 2116.81,785.35 U10.15@2116.81,772.53
  L3 w8: v1(1863.13,1324.53) 1923.13,1324.53 1995.13,1252.53 1995.13,1118.53 1952.13,1075.53 1952.13,855.53 1970.13,837.53 2023.63,838.05 2046.71,838.05 v2(2047.24,838.58)
NetC120_1: C120.1 L33.2 R112.2 U10.16 | length 962.1
  L1 w10: R112.2@2034.13,1115.53 R112.2@2034.13,1132.53 ; R112.2@2040.13,1132.53 2042.13,1130.53 2042.13,1094.53 2032.13,1084.53 v1(2003.13,1084.53) 1962.13,1043.53 C120.1@1962.13,1008.53 1939.13,1008.53 1937.13,1006.53 1937.13,861.53 2026.13,772.53 U10.16@2097.13,772.53
  L3 w10: v1(1857.13,1381.53) 1890.13,1348.53 1935.78,1348.53 2025.13,1259.19 2025.13,1107.53 2003.13,1085.53 v1(2003.13,1084.53)
NetC120_2: C120.2 P2.10 R112.1 U10.14 | length 1110.3
  L1 w8: v2(2087.77,839.41) 2096.41,830.78 2104.87,830.78 2136.5,799.15 U10.14@2136.5,772.53
  L1 w10: 1957.83,884.83 2017.62,825.03 v2(2017.62,814.69) ; 1961.33,886.33 1961.33,967.73 C120.2@1962.13,968.53
  L1 w15: C120.2@1962.13,968.53 1966.26,968.53 1987.43,989.69 1987.43,991.83 1993.13,997.53 R112.1@2040.13,997.53
  L3 w10: v1(1943.13,382.53) 1967.13,382.53 1978.13,393.53 1978.13,604.53 2046.13,672.53 2046.13,788.53 2028.13,806.53
  L4 w10: P2.10@1813.13,296.53 1899.13,382.53 v1(1943.13,382.53) ; v2(2017.62,814.69) 2025.23,807.09 2070.87,807.09 2087.77,823.99 v2(2087.77,839.41)
NetC121_1: C121.1 C123.1 U10.19 | length 170.8
  L1 w8: C121.1@1981.13,666.53 2011.13,666.53 2016.13,671.53 v1(2016.13,712.53) v1@2023.06,705.6
  L1 w10: v1@2023.06,705.6 U10.19@2069.57,705.6
  L4 w8: C123.1@1980.13,711.53 2015.13,711.53 v1(2016.13,712.53)
NetC122_1: C122.1 C124.1 U10.17 | length 140.6
  L1 w10: C122.1@1980.13,711.53 C124.1@1980.13,757.53 2013.13,757.53 2025.69,744.97 U10.17@2069.57,744.97
NetD2_2: D2.2 Q1.B R9.2 | length 308.1
  L1 w10: D2.2@3136.13,511.58 3157.07,511.58 v1(3164.13,504.53)
  L4 w10: v1(3164.13,504.53) 3164.13,509.53 3154.13,519.53 3154.13,556.53 R9.2@3129.13,581.53 3129.13,602.53 3153.13,626.53 3230.13,626.53 Q1.B@3268.13,588.53
NetD6_K: D6.K R11.1 | length 81
  L4 w20: D6.K@3244.16,531.15 3245.4,531.15 3289.03,487.53 R11.1@3307.13,487.53
NetD7_1: D7.1 R20.2 | length 55
  L1 w20: R20.2@3397.13,178.53 3397.18,178.47 D7.1@3397.18,123.53
NetD8_1: D8.2 R38.1 | length 61.7
  L1 w10: D8.2@2362.27,1751.62 2397.22,1751.62 R38.1@2416.13,1770.53
NetD8_2: D8.1 U3.3 | length 946.3
  L1 w8: 2744.81,1964.84 2753.53,1973.56 2753.53,2025.69 2759.33,2031.49 2759.33,2039.97 2761.13,2041.77 v1(2761.13,2062.53)
  L1 w10: v1@2259.13,1760.28 2267.78,1751.62 D8.1@2303.21,1751.62 ; U3.3@2744.81,1942.53 2744.81,1964.84
  L3 w10: v1(2259.13,1764.53) 2259.13,2014.53 2290.13,2045.53 2744.13,2045.53 v1(2761.13,2062.53)
NetD9_1: D9.2 R39.1 | length 53.9
  L1 w10: D9.2@2362.27,1818.55 R39.1@2416.15,1818.55
NetD9_2: D9.1 R120.1 U3.2 | length 872.1
  L1 w10: v1(2301.13,1869.53) 2303.21,1867.44 D9.1@2303.21,1818.55 ; U3.2@2764.5,1957.94 2764.5,1959.36 2770.33,1965.19 2770.33,1988.39 2772.76,1990.82 2772.76,2021.16 v1(2782.13,2030.53) 2796.78,2030.53 2815.85,2011.46 R120.1@2838.65,2011.46
  L1 w12: 2764.5,1932.72 U3.2@2764.5,1957.94
  L3 w10: v1(2301.13,1869.53) 2301.13,1907.53 2321.13,1927.53 2359.13,1927.53 2384.13,1952.53 2384.13,1996.53 2403.13,2015.53 2577.13,2015.53 2627.93,1964.73 2738.33,1964.73 2782.13,2008.53 v1(2782.13,2030.53)
NetD14_1: D14.1 R68.2 | length 55.9
  L1 w10: D14.1@2644.18,1390.53 R68.2@2700.13,1390.53
NetD15_1: D15.1 R67.2 | length 51.9
  L1 w10: D15.1@2640.18,1457.53 R67.2@2692.13,1457.53
NetD18K: C8.1 C9.1 D4.K D16.K R17.2 U2.3 | length 2852.6
  L1 w8: v1(3437.06,448.47) 3451.13,462.53 R17.2@3451.13,472.53 ; C9.1@3550.13,237.53 3550.13,272.42 v1(3547.3,275.24) 3547.3,310.37 U2.3@3551.09,314.16
  L1 w15: 3628.96,197.81 3774.35,197.81
  L1 w20: v1(1732.35,153.2) D4.K@1815.02,153.2 ; C9.1@3550.13,237.53 3589.24,237.53 3628.96,197.81 ; 3774.35,197.81 3790.38,197.81 3811.09,177.1 3811.09,129.57 C8.1@3824.13,116.53
  L2 w20: v1(1732.35,153.2) 1811.09,74.46 3346.51,74.46 v1(3547.3,275.24)
  L4 w15: D16.K@3366.2,393.35 D16.K@3381.95,393.35
  L4 w20: D16.K@3381.95,393.35 v1(3437.06,448.47) 3523.69,448.47 3566.99,405.17 3566.99,309.72 3551.24,293.98 v1@3551.24,275.24
NetJ1_1: J1.1 TrET1.12 | length 980.2
  L1 w10: J1.1@1635.13,2465.53 1592.13,2465.53 1533.13,2406.53 1533.13,2164.53 1666.13,2031.53 2003.62,2031.53 2030.8,2058.71 TrET1.12@2030.8,2106.43
NetJ1_2: J1.2 TrET1.10 | length 421.6
  L1 w10: v1(1925.26,2259.5) 1933.13,2267.37 TrET1.10@2029.87,2267.37
  L4 w10: J1.2@1736.13,2415.53 1871.59,2415.53 1925.26,2361.86 v1(1925.26,2259.5)
NetJ1_3: J1.3 TrET1.9 | length 531
  L1 w10: J1.3@1636.13,2365.53 J1.3@1636.13,2392.53 ; v1(1968.13,2378.53) TrET1.9@2021.02,2378.53
  L4 w10: J1.3@1636.13,2365.53 1682.93,2412.33 1682.93,2446.3 1728.41,2491.78 1854.87,2491.78 v1(1968.13,2378.53)
NetJ1_4: J1.4 J1.5 R27.1 | length 221.4
  L1 w10: J1.5@1636.13,2265.53 1681.13,2310.53 1730.13,2310.53 J1.4@1735.13,2315.53 1744.13,2324.53 R27.1@1833.13,2324.53
NetJ1_6: J1.6 TrET1.7 | length 760.4
  L1 w10: v1(1925.26,2216.19) 1960.69,2216.19 1972.5,2228 2098.49,2228 2114.24,2243.75 2114.24,2519.34 2086.2,2547.37 TrET1.7@2029.87,2547.37
  L4 w10: J1.6@1736.13,2215.53 v1@1924.6,2215.53
NetJ1_7: J1.7 J1.8 R34.1 | length 215.7
  L1 w10: J1.7@1636.13,2165.53 1686.13,2115.53 J1.8@1735.13,2115.53 ; J1.8@1748.13,2115.53 1772.13,2091.53 R34.1@1834.13,2091.53
NetJ2_1: J2.1 P4.2 | length 196
  L4 w12: P4.2@3098.43,1170.87 3122.86,1170.87 3159.53,1134.2 3172.89,1134.2 3200.79,1106.3 J2.1@3200.79,1039.37
NetJ2_2: J2.2 J3.2 M2.12 | length 632.3
  L1 w15: J3.2@3298.13,895.53 3298.13,1030.53 3500.97,1030.53 3535.43,996.06 3535.43,755.91 M2.12@3531.5,751.97
NetJ3_1: J3.1 U5.51 | length 575.6
  L2 w8: v1(2804.13,830.53) 2809.93,836.33 3010.33,836.33 3067.13,779.53 3094.13,779.53 v1(3095.13,778.53)
  L4 w8: U5.51@2785.89,771.66 2785.89,812.29 v1(2804.13,830.53) ; v1(3095.13,778.53) 3139.13,778.53 3151.13,790.53 3151.13,859.53 3187.13,895.53 J3.1@3198.13,895.53
NetJ4_1: J4.1 P4.3 | length 409.1
  L1 w15: P4.3@3093.13,1266.53 3061.13,1266.53 3004.13,1323.53 3004.13,1391.53 3030.13,1417.53 3151.13,1417.53 J4.1@3201.13,1467.53
NetJ4_2: J4.2 J5.2 M2.11 | length 877.8
  L1 w15: J4.2@3301.13,1467.53 3302.13,1466.53 J5.2@3302.13,1321.53 ; M2.11@3472.44,751.97 v6(3472.44,933.07)
  L4 w15: J5.2@3302.13,1321.53 3458,1321.53 3472.44,1307.09 v6(3472.44,933.07)
NetJ5_1: J5.1 U5.50 | length 1310.2
  L3 w8: J5.1@3202.13,1317.53 J5.1@3202.13,1321.53
  L3 w10: J5.1@3202.13,1317.53 3255.91,1263.75 3255.91,988.94 3267.72,977.13 3267.72,937.01 3248.03,917.32 3248.03,822.83 v1(3303.15,822.83)
  L4 w8: 3029.13,712.53 3081.13,660.53
  L4 w10: U5.50@2805.57,771.66 2805.57,734.08 2862.83,676.82 2929.42,676.82 2965.13,712.53 3029.13,712.53 ; 3081.13,660.53 3157.99,660.53 3185.6,688.14 3185.6,707.82 3193.96,716.19 3240.22,716.19 3248.13,724.09 3248.13,804.53 3266.43,822.83 v1(3303.15,822.83)
NetJ6_1: J6.1 J7.2 M2.8 | length 973.4
  L1 w10: 3248.03,810.43 3248.03,940.94
  L1 w12: 3248.03,940.94 3267.72,960.63 3267.72,988.19 3255.91,1000 3255.91,1123.75
  L1 w15: J7.2@3202.13,764.53 3248.03,810.43 ; 3255.91,1123.75 J6.1@3202.13,1177.53 3202.13,1237.56 3240.16,1275.59 3409.45,1275.59 3472.44,1338.58 M2.8@3472.44,1472.44
NetL4_1: L4.1 P3.1 | length 1315.2
  L1 w10: L4.1@300.13,1417.53 307.15,1424.55 307.15,1467.55 374.13,1534.53 1431.13,1534.53 1471.13,1574.53 P3.1@1525.13,1574.53
NetL4_2: L4.2 R40.2 R41.2 | length 109.3
  L1 w12: R41.2@236.13,1312.53 237.13,1313.53 R40.2@293.13,1313.53 293.13,1355.53 L4.2@300.13,1362.53
NetL5_2: L5.2 R41.1 R42.2 | length 860.9
  L1 w8: R42.2@441.13,913.67 413.13,941.67 413.13,1179.53 448.13,1214.53 448.13,1272.53 468.13,1292.53
  L1 w10: v1(161.13,1342.53) 161.13,1326.78 175.38,1312.53 R41.1@196.13,1312.53 196.13,1361.53 L5.2@197.13,1362.53 ; 468.13,1292.53 v1(468.13,1314.53)
  L2 w10: v1(161.13,1342.53) 440.13,1342.53 v1(468.13,1314.53)
NetL7_1: L7.1 P3.2 | length 1379.9
  L1 w10: L7.1@358.33,1417.53 358.33,1460.73 400.13,1502.53 1597.13,1502.53 1625.13,1530.53 P3.2@1625.13,1571.53
NetL7_2: L7.2 R47.2 R49.2 | length 90
  L1 w12: L7.2@355.13,1362.53 392.13,1362.53 392.13,1349.28 392.13,1322.78 R47.2@392.13,1309.53
NetL8_2: L8.2 R49.1 R50.2 | length 562.8
  L1 w8: 391.13,1196.53 427.13,1232.53 427.13,1400.53
  L1 w10: R50.2@391.13,913.67 391.13,1196.53 ; R49.1@401.13,1400.53 427.13,1400.53 444.13,1417.53 L8.2@455.13,1417.53
NetL10_1: L10.1 P3.3 | length 1106.2
  L1 w10: L10.1@751.13,1416.53 751.13,1456.53 773.13,1478.53 1708.13,1478.53 1725.13,1495.53 P3.3@1725.13,1571.53
NetL10_2: L10.2 R55.2 R57.2 | length 112.8
  L1 w10: R57.2@684.13,1307.53 R55.2@737.13,1307.53 751.13,1321.53 L10.2@751.13,1361.53
NetL11_2: L11.2 R57.1 R58.2 | length 752.4
  L1 w10: R57.1@644.13,1307.53 v1(644.13,1334.53) L11.2@644.13,1361.53 ; R58.2@901.13,915.53 901.13,947.53 871.13,977.53 871.13,1176.53 901.13,1206.53 v1(901.13,1319.53)
  L2 w10: v1(644.13,1334.53) 651.77,1342.17 878.48,1342.17 v1(901.13,1319.53)
NetL13_1: L13.1 P3.4 | length 1149.4
  L1 w10: L13.1@806.13,1416.53 806.13,1428.53 830.13,1452.53 1807.13,1452.53 1825.13,1470.53 P3.4@1825.13,1571.53
NetL13_2: L13.2 R63.2 R64.2 | length 522.7
  L1 w10: R63.2@798.13,913.53 800.93,916.33 800.93,1259.33 806.13,1264.53 L13.2@806.13,1361.53 810.03,1361.53 852.03,1403.53 R64.2@860.13,1403.53
NetL14_2: L14.2 R64.1 R66.2 | length 106.7
  L1 w10: R66.2@858.13,1303.53 858.13,1361.53 860.13,1363.53 903.13,1363.53 L14.2@905.13,1365.53
Netl16_1: L16.1 P3.5 | length 892.5
  L1 w10: v1(1162.13,1391.53) 1164.13,1391.53 L16.1@1185.13,1412.53
  L2 w10: v1(1162.13,1391.53) 1211.13,1440.53 1250.13,1440.53 1331.13,1521.53 1914.13,1521.53 1926.13,1533.53 P3.5@1926.13,1571.53
NetL16_2: L16.2 R74.2 R75.2 | length 571.7
  L1 w10: L16.2@1185.13,1357.53 1185.13,1332.53 1208.63,1309.03 1208.63,1276.03 v1(1207.13,1274.53) ; v1(1341.13,1190.53) 1329.13,1178.53 1329.13,964.53 R74.2@1380.13,913.53
  L2 w10: v1(1207.13,1274.53) 1207.13,1263.53 1280.13,1190.53 v1(1341.13,1190.53)
NetL17_2: L17.2 R75.1 R77.2 | length 127.5
  L1 w12: L17.2@1071.13,1358.53 1106.13,1323.53 R77.2@1106.13,1307.53 R75.1@1168.13,1307.53
NetL19_1: L19.1 P3.6 | length 945.7
  L1 w10: v1(1220.47,1393.7) 1240.3,1413.53 L19.1@1242.03,1413.53
  L2 w10: v1(1220.47,1393.7) 1228.64,1385.53 1252.13,1385.53 1363.13,1496.53 2002.13,1496.53 2026.13,1520.53 P3.6@2026.13,1571.53
NetL19_2: L19.2 R80.2 R82.2 | length 517.8
  L1 w10: R80.2@1238.13,913.53 1258.13,933.53 1258.13,1290.53 1240.13,1308.53 1240.13,1358.53 L19.2@1242.03,1358.53 R82.2@1281.03,1397.53
NetL20_2: L20.2 R82.1 R83.2 | length 106
  L1 w10: R83.2@1289.13,1301.53 R82.1@1289.13,1357.53 L20.2@1339.13,1357.53
NetL22_1: L22.1 P3.7 | length 670.9
  L1 w10: v1(1600.13,1392.53) 1600.13,1391.53 L22.1@1622.13,1413.53
  L2 w10: v1(1600.13,1392.53) 1600.13,1409.53 1669.13,1478.53 2082.13,1478.53 2126.13,1522.53 P3.7@2126.13,1571.53
NetL22_2: L22.2 R87.2 R88.2 | length 156.3
  L1 w10: R88.2@1545.13,1307.53 1545.13,1296.53 1559.13,1282.53 1599.13,1282.53 1619.13,1302.53 R87.2@1619.13,1308.53 1619.13,1355.53 L22.2@1622.13,1358.53
NetL23_2: L23.2 R88.1 R89.2 | length 751.4
  L1 w10: v1(1480.13,1335.53) 1480.13,1334.53 1484.13,1330.53 1505.13,1330.53 ; R88.1@1505.13,1307.53 1505.13,1330.53 ; L23.2@1505.13,1356.53 1505.13,1330.53 ; v1(1765.13,1198.53) 1765.13,959.53 1779.13,945.53 R89.2@1779.13,913.53
  L2 w10: v1(1480.13,1335.53) 1519.13,1296.53 1739.13,1296.53 1764.13,1271.53 1764.13,1199.53 v1(1765.13,1198.53)
NetL25_1: L25.1 P3.8 | length 726.2
  L1 w10: v1(1658.13,1338.53) L25.1@1678.13,1358.53
  L2 w10: v1(1658.13,1338.53) 1775.13,1455.53 2167.13,1455.53 2226.13,1514.53 P3.8@2226.13,1571.53
NetL25_2: L25.2 R92.2 R94.2 | length 189.6
  L1 w10: L25.2@1678.13,1413.53 1697.13,1413.53 1722.13,1388.53 ; R92.2@1722.13,1303.53 1722.13,1388.53 ; R94.2@1766.13,1403.53 1737.13,1403.53 1722.13,1388.53
NetL26_2: L26.2 R94.1 R95.2 | length 512.6
  L1 w10: R95.2@1729.13,913.53 1729.13,1204.53 1766.13,1241.53 R94.1@1766.13,1363.53 1809.13,1363.53 L26.2@1812.13,1360.53
NetL28_1: L28.1 P3.9 | length 501.5
  L1 w10: L28.1@1943.13,1415.53 1943.13,1454.53 1977.13,1488.53 2296.13,1488.53 2326.13,1518.53 P3.9@2326.13,1571.53
NetL28_2: L28.2 R101.2 R103.2 | length 784.1
  L1 w8: v1(1912.13,1378.53) 1912.13,1384.53 1936.13,1360.53 L28.2@1943.13,1360.53 ; R103.2@2117.13,1250.53 2125.13,1250.53 v1(2150.13,1275.53) ; R103.2@2118.13,1249.53 2118.13,1018.53 2204.13,932.53 2204.13,913.53 R101.2@2203.13,912.53
  L2 w8: v1(1912.13,1378.53) 1912.13,1384.53 2095.13,1384.53 2150.13,1329.53 v1(2150.13,1275.53)
NetL29_2: L29.2 R103.1 R104.2 | length 166.6
  L1 w10: R103.1@2117.13,1290.53 2176.13,1349.53 L29.2@2176.13,1358.53 2168.13,1358.53 2129.13,1397.53 R104.2@2118.13,1397.53
NetL31_1: L31.1 P3.10 | length 535.1
  L1 w10: L31.1@2005.13,1413.53 2005.13,1440.53 2029.13,1464.53 2375.13,1464.53 2426.13,1515.53 P3.10@2426.13,1571.53
NetL31_2: L31.2 R109.2 R110.2 | length 118.4
  L1 w8: R109.2@1922.13,1305.53 R110.2@1975.13,1305.53 1975.13,1328.53 L31.2@2005.13,1358.53
NetL32_2: L32.2 R110.1 R111.2 | length 535.9
  L1 w8: R110.1@2016.13,1306.53 v1(2055.13,1306.53) 2055.13,1324.53 2064.13,1333.53 L32.2@2064.13,1358.53 ; R111.2@2017.61,911.53 2017.61,939.01 v1(2029.13,950.53)
  L3 w8: v1(2029.13,950.53) 2089.13,1010.53 2089.13,1266.53 2052.13,1303.53 v1(2055.13,1306.53)
NetM2_3: P5.4 U5.43 | length 2463.6
  L2 w8: v1(2114.13,936.53) 2114.13,937.53 2145.13,968.53 2268.13,968.53 2319.68,916.98 2343.02,916.98 2358.77,932.72 2741.93,932.72 2759.39,915.27 2759.39,899.79 2733.13,873.53 2733.13,870.93 v1(2728.34,866.14)
  L3 w8: v2@1911.54,1745.94 1911.13,1745.53 1911.13,1684.53 1973.34,1622.32 2040.34,1622.32 2067.45,1595.2 2067.45,1390.29 2026.13,1348.96 2026.13,1290.53 2053.13,1263.53 2053.13,1083.53 1998.13,1028.53 1998.13,928.53 2027.13,899.53 2079.13,899.53 2116.13,936.53 v1(2114.13,936.53)
  L4 w8: P5.4@1589.37,1803.15 1589.37,1833.46 1598.43,1842.52 1814.96,1842.52 v2(1911.13,1746.35) ; 2740.16,870.08 2809.58,939.5 ; 2802.55,940.95 U5.43@2896.13,940.95
NetM2_5: P5.8 U5.32 U7.5 | length 2441.5
  L1 w10: v1(2744.13,1109.53) 2731.57,1109.53 2699.13,1077.08 2699.13,954.53 2759.13,894.53 U7.5@2787.58,894.53 ; v1(2855.13,1203.53) 2878.13,1226.53 2878.13,1542.53 2900.13,1564.53 2900.13,1753.53 2900.65,1754.05 2900.65,1760.76 v1(2897.63,1763.78)
  L2 w8: v1(2744.13,1109.53) 2744.93,1108.73 2797.7,1108.73 2822.83,1133.86 2822.83,1156.24 v1(2824.13,1157.53)
  L2 w10: P5.8@1689.37,1803.15 1689.37,1850.79 1704.72,1866.14 1834.65,1866.14 1893.7,1807.09 2129.92,1807.09 2139.36,1816.53 2396.13,1816.53 2441.33,1861.73 2488.12,1861.73 2503.92,1877.53 2574.13,1877.53 2635.13,1816.53 2701.33,1816.53 2701.49,1816.37 2721.2,1816.37 2721.37,1816.53 2748.57,1816.53 2748.73,1816.37 2768.45,1816.37 2768.61,1816.53 2820.98,1816.53 2877.11,1760.4 2894.25,1760.4 v1@2900.13,1754.53
  L4 w10: v1(2824.13,1157.53) 2825.26,1158.66 U5.32@2825.26,1208.67 2849.98,1208.67 v1(2855.13,1203.53)
NetM2_6: P5.10 U5.29 U7.6 | length 2052.4
  L1 w10: v1(2766.13,1131.53) 2766.13,1121.19 2767.93,1119.39 2767.93,1098.63 2723.13,1053.83 2723.13,966.53 2745.13,944.53 U7.6@2783.65,944.53
  L2 w10: P5.10@1739.37,1803.15 1838.58,1803.15 1854.33,1787.4 2163.41,1787.4 2232.28,1718.53 2440.72,1718.53 2442.89,1716.35 2462.61,1716.35 2464.78,1718.53 2631.47,1718.53 2633.64,1716.36 2659.46,1716.36 2661.63,1718.53 2767.13,1718.53 2803.13,1682.53 v1(2803.13,1675.53)
  L3 w10: v1(2766.13,1131.53) 2776.13,1141.53 2776.13,1586.08 2755.91,1606.3 2755.91,1657.31 2780.13,1681.53 2797.13,1681.53 v1(2803.13,1675.53)
  L4 w10: v1@2766.2,1132.61 U5.29@2766.2,1208.67
NetM2_7: P5.5 U5.31 U7.2 | length 2080.3
  L1 w10: U7.2@2598.61,994.53 2650.13,994.53 2677.23,1021.63 2677.23,1082.09 2748.13,1152.99 2748.13,1227.53 2784.13,1263.53 v1(2826.13,1263.53) 2826.13,1527.53 2789.13,1564.53 v1(2789.13,1629.53)
  L2 w10: P5.5@1639.37,1753.15 1639.37,1726.77 1657.48,1708.66 2178.09,1708.66 2236.22,1650.53 2768.13,1650.53 v1(2789.13,1629.53)
  L4 w10: U5.31@2805.57,1208.67 2805.57,1244.98 2824.13,1263.53 v1(2826.13,1263.53)
NetM2_8: P5.3 U5.17 | length 1373.7
  L2 w8: v1(2229.13,1333.53) 2234.13,1338.53 2299.13,1338.53
  L2 w10: P5.3@1589.37,1753.15 1589.37,1698.03 1610.24,1677.17 v2(2019.69,1677.17) ; 2299.13,1338.53 v1(2454.13,1338.53)
  L3 w8: v2@2019.59,1677.07 2106.59,1677.07 2177.13,1606.53 2177.13,1385.53 v1(2229.13,1333.53)
  L4 w10: v1(2454.13,1338.53) 2469.13,1323.53 2469.13,1252.53 2512.98,1208.67 U5.17@2529.98,1208.67
NetP1_2: P1.2 U5.15 | length 143.9
  L4 w10: 2404.53,1118.12 U5.15@2459.12,1118.12
  L4 w12: P1.2@2336.13,1168.53 2354.13,1168.53 2404.53,1118.12
NetP1_3: P1.3 U5.16 | length 445.8
  L4 w10: P1.3@2336.13,1068.53 2296.13,1068.53 2250.13,1114.53 2250.13,1179.26 2286.39,1215.53 2418.13,1215.53 2462.13,1171.53 U5.16@2462.13,1140.81
NetP2_15: P2.15 U11.6 | length 95.4
  L1 w20: U11.6@2313.72,200.53 P2.15@2313.72,295.93
NetP2_16: P2.16 U11.3 | length 217.9
  L1 w12: P2.16@2415.13,280.53 P2.16@2415.13,294.53
  L1 w20: U11.3@2388.53,106.04 2408.64,106.04 2423.13,120.53 2423.13,272.53 P2.16@2415.13,280.53
NetP2_17: P2.17 U12.6 | length 95.3
  L1 w20: U12.6@2513.32,201.02 P2.17@2513.32,296.33
NetP2_18: P2.18 U12.3 | length 225.8
  L1 w20: U12.3@2588.13,106.53 2613.13,106.53 2626.13,119.53 2626.13,267.53 2613.13,280.53 P2.18@2613.13,296.53
NetP2_19: P2.19 U13.6 | length 96.2
  L1 w15: P2.19@2713.13,296.53 P2.19@2713.72,295.93
  L1 w20: U13.6@2713.72,200.53 P2.19@2713.72,295.93
NetP2_20: P2.20 U13.3 | length 226.4
  L1 w20: U13.3@2788.53,106.04 2812.64,106.04 2827.13,120.53 2827.13,282.53 P2.20@2813.13,296.53
NetP2_21: P2.21 U14.6 | length 96.7
  L1 w15: P2.21@2912.72,296.13 P2.21@2913.13,296.53
  L1 w20: U14.6@2912.72,200.02 P2.21@2912.72,296.13
NetP2_22: P2.22 U14.3 | length 223.4
  L1 w20: U14.3@2987.53,105.53 3009.13,105.53 3024.13,120.53 3024.13,285.53 P2.22@3013.13,296.53
NetP2_23: P2.23 U15.6 | length 95.6
  L1 w20: U15.6@3111.72,201.53 3113.13,202.93 P2.23@3113.13,296.53
NetP2_24: P2.24 U15.3 | length 231.4
  L1 w20: U15.3@3186.53,107.04 3209.64,107.04 3234.13,131.53 3234.13,275.53 P2.24@3213.13,296.53
NetP3_10: 
NetP5_1: P7.1 U21.6 | length 210.7
  L1 w15: U21.6@1395.72,202.02 1395.72,171.93 1412.13,155.53 1568.13,155.53 P7.1@1569.13,156.53